# EAGLE board coreTwo (EAGLE 5.07)
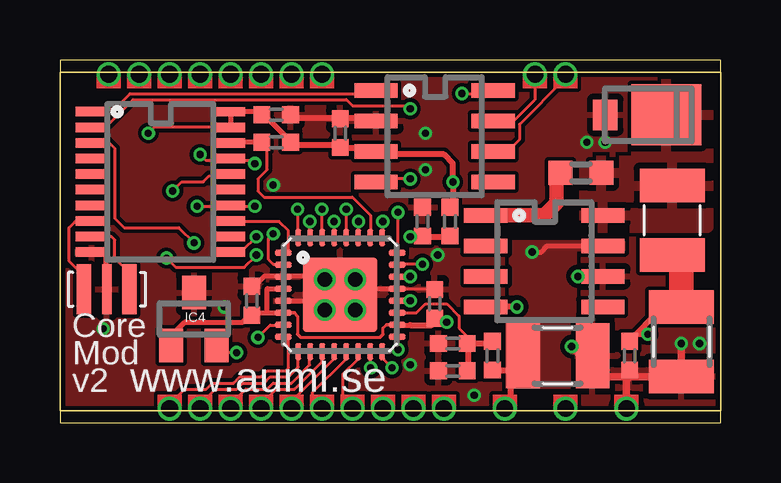
[diagram p0: board, top side]
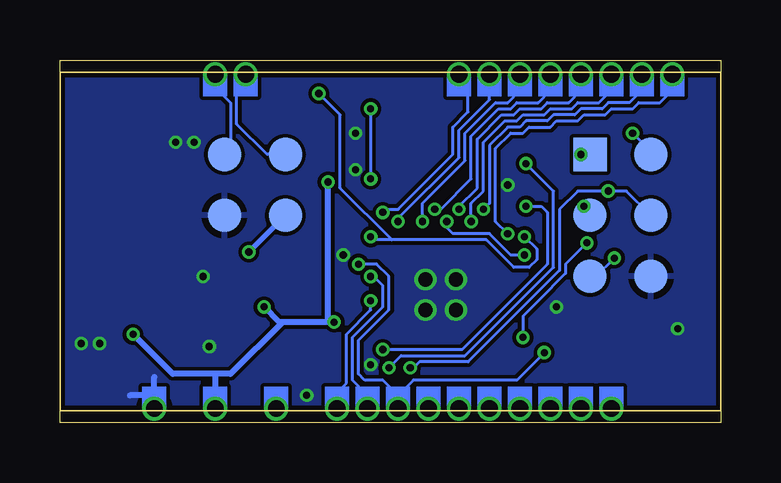
[diagram p1: board, bottom side, seen from below]

Size 27.56 x 15.11 mm. Coordinates in mm from the lower left corner, seen from the top.
Outline: 27.56,0.51 27.56,14.61
Outline: 27.56,14.61 27.56,15.11 0,15.11 0,14.61
Outline: 0,14.61 0,0.51
Outline: 0,0.51 0,0 27.56,0 27.56,0.51
Outline: 27.56,14.61 0,14.61
Outline: 0,0.51 27.56,0.51
Copper layers (1*16): Top 0.035mm / dielectric 1.5mm / Bottom 0.035mm
Design rules "10mils, 0.6drill *": minimum track width 5mil, minimum drill 0.3mm, track to track 5mil, track to pad 5mil, pad to pad 6mil, via to via 6mil, smd to smd 0mil, copper to edge 8mil, drill to drill 10mil, minimum pad ring 1mil, minimum via ring 5mil, stop-mask expansion 0mil, vias tented up to drill 0.7mm, thermal gap 10mil
Milling: 4 lines

## Footprints (pad centres in the part's own frame; a part is rotated, then mirrored left to right if it is on the bottom)
C0402 = smd 0.7 x 0.7: 1 -0.6,0; 2 0.6,0
C0603 = smd 1 x 1: 1 -0.85,0; 2 0.85,0
C1210 = smd 1.4 x 2.7: 1 -1.4,0; 2 1.5,0
CORETWO_PIN = drill 0.7 pad 1 round: 1 0,-0.084
DO-220AA = smd 1.016 x 1.27: A 1.143,0 | smd 2.921 x 2.54: C -1.397,0
TSSOP = smd 0.396 x 1.3: 1 -2.925,-2.875; 2 -2.275,-2.875; 3 -1.625,-2.875; 4 -0.975,-2.875; 5 -0.325,-2.875; 6 0.325,-2.875; 7 0.975,-2.875; 8 1.625,-2.875; 9 2.275,-2.875; 10 2.925,-2.875; 11 2.925,2.875; 12 2.275,2.875; 13 1.625,2.875; 14 0.975,2.875; 15 0.325,2.875; 16 -0.325,2.875; 17 -0.975,2.875; 18 -1.625,2.875; 19 -2.275,2.875 | smd 0.369 x 1.3: 20 -2.925,2.875
SOIC = smd 0.6 x 1.8: 1 -1.905,-2.44; 2 -0.635,-2.44; 3 0.635,-2.44; 4 1.905,-2.44; 5 1.905,2.44; 6 0.635,2.44; 7 -0.635,2.44; 8 -1.905,2.44
MLF32 = smd 0.7 x 0.24: 1 -2.375,1.75; 2 -2.375,1.25; 3 -2.375,0.75; 4 -2.375,0.25; 5 -2.375,-0.25; 6 -2.375,-0.75; 7 -2.375,-1.25; 8 -2.375,-1.75; 17 2.375,-1.75; 18 2.375,-1.25; 19 2.375,-0.75; 20 2.375,-0.25; 21 2.375,0.25; 22 2.375,0.75; 23 2.375,1.25; 24 2.375,1.75 | smd 0.24 x 0.7: 9 -1.75,-2.375; 10 -1.25,-2.375; 11 -0.75,-2.375; 12 -0.25,-2.375; 13 0.25,-2.375; 14 0.75,-2.375; 15 1.25,-2.375; 16 1.75,-2.375; 25 1.75,2.375; 26 1.25,2.375; 27 0.75,2.375; 28 0.25,2.375; 29 -0.25,2.375; 30 -0.75,2.375; 31 -1.25,2.375; 32 -1.75,2.375 | smd 3.1 x 3.1: BPAD 0,0
SOT23 = smd 1 x 1.4: 1 -0.95,-1.1; 2 0.95,-1.1; 3 0,1.1
SO8 = smd 0.6 x 1.8: 1 -1.905,-2.44; 2 -0.635,-2.44; 3 0.635,-2.44; 4 1.905,-2.44; 5 1.905,2.44; 6 0.635,2.44; 7 -0.635,2.44; 8 -1.905,2.44
1X01_SMD = smd 1.4 x 1.4: 1 0,0
L1210 = smd 1.4 x 2.7: 1 -1.4,0; 2 1.5,0
SMD = smd 0.6 x 2.1: 1 -0.27,0.1; 3 1.63,0.1 | smd 0.4 x 2.1: 2 0.68,0.1
R0402 = smd 0.7 x 0.7: 1 -0.6,0; 2 0.6,0
6PINSMD = smd 1.4 x 1.4 bottom: 1 0,2.54; 2 -2.54,2.54; 3 0,0; 4 -2.54,0; 5 0,-2.54; 6 -2.54,-2.54

## Placement (x,y rotation side)
C10  100n  [C0402]  11.68,12.07 90 top
C11  100n  [C0402]  15.62,4.95 90 top
C12  100n  [C0402]  9.02,12.83 0 top
C13  100n  [C0402]  8,5.08 90 top
C20  [C0402]  16.38,3.3 180 top
C40  [C0603]  21.72,10.41 0 top
C41  [C1210]  20.7,2.79 0 top
C42  [C1210]  25.91,3.43 270 top
C43  [C0402]  23.75,2.79 270 top
CANH  CORETWO_PIN  [CORETWO_PIN]  19.81,14.61 0 top
CANL  CORETWO_PIN  [CORETWO_PIN]  21.08,14.61 0 top
D1  [DO-220AA]  23.88,12.83 180 top
EXP_A  CORETWO_PIN  [CORETWO_PIN]  4.57,0.51 180 top
EXP_B  CORETWO_PIN  [CORETWO_PIN]  12.19,0.51 180 top
EXP_C  CORETWO_PIN  [CORETWO_PIN]  10.92,0.51 180 top
EXP_D  CORETWO_PIN  [CORETWO_PIN]  9.65,0.51 180 top
EXP_E  CORETWO_PIN  [CORETWO_PIN]  8.38,0.51 180 top
EXP_F  CORETWO_PIN  [CORETWO_PIN]  7.11,0.51 180 top
EXP_G  CORETWO_PIN  [CORETWO_PIN]  5.84,0.51 180 top
EXP_H  CORETWO_PIN  [CORETWO_PIN]  2.03,14.61 0 top
EXP_I  CORETWO_PIN  [CORETWO_PIN]  3.3,14.61 0 top
EXP_J  CORETWO_PIN  [CORETWO_PIN]  4.57,14.61 0 top
EXP_K  CORETWO_PIN  [CORETWO_PIN]  5.84,14.61 0 top
EXP_L  CORETWO_PIN  [CORETWO_PIN]  7.11,14.61 0 top
EXP_M  CORETWO_PIN  [CORETWO_PIN]  8.38,14.61 0 top
EXP_N  CORETWO_PIN  [CORETWO_PIN]  9.65,14.61 0 top
EXP_O  CORETWO_PIN  [CORETWO_PIN]  10.92,14.61 0 top
EXP_P  CORETWO_PIN  [CORETWO_PIN]  13.46,0.51 180 top
EXP_Q  CORETWO_PIN  [CORETWO_PIN]  14.73,0.51 180 top
EXP_R  CORETWO_PIN  [CORETWO_PIN]  16,0.51 180 top
GND  CORETWO_PIN  [CORETWO_PIN]  23.62,0.51 180 top
IC1  MCP2515  [TSSOP]  4.19,10.04 270 top
IC2  MCP2551  [SOIC]  15.62,11.94 270 top
IC3  ATMEGA88-M32  [MLF32]  11.68,5.33 0 top
IC4  TC1047A  [SOT23]  5.59,4.32 0 top
IC5  [SO8]  20.19,6.73 270 top
JP1  [1X01_SMD]  20.7,8.64 0 bottom
JP2  [1X01_SMD]  20.7,11.18 0 bottom
JP3  [1X01_SMD]  18.16,8.64 0 bottom
JP4  [1X01_SMD]  18.16,11.18 0 bottom
L1  [L1210]  25.53,8.38 90 top
Q1  [SMD]  1.27,5.46 0 top
R1  [R0402]  9.02,11.68 180 top
R50  [R0402]  18.03,2.79 270 top
R51  [R0402]  16.38,2.16 0 top
R52  [R0402]  16.26,8.38 90 top
R53  [R0402]  15.11,8.38 270 top
V_CAN  CORETWO_PIN  [CORETWO_PIN]  18.54,0.51 180 top
VCC  CORETWO_PIN  [CORETWO_PIN]  21.08,0.51 180 top
X2  AVRISP6PIN  [6PINSMD]  5.46,8.64 0 top

## Library data of the parts
C10-C13 C20 C40-C43 L1 R1 R50-R53 = rcl
CANH CANL EXP_A EXP_B EXP_C EXP_D EXP_E EXP_F EXP_G EXP_H EXP_I EXP_J EXP_K EXP_L EXP_M EXP_N EXP_O EXP_P EXP_Q EXP_R GND V_CAN VCC = expboard
D1 = diode
IC1 = mcp2515
IC2 = mcp2551
IC3 = atmega88
IC4 = tc1047a
IC5 = lm2674
JP1-JP4 = pinhead-mm
Q1 = xtal_CSTCE
X2 = avrisp

## Nets
CAN_RS: IC1.11 IC2.8 R52.1 R53.2
CANH: CANH.1 IC2.7 JP4.1
CANL: CANL.1 IC2.6 JP2.1
CB: C40.1 IC5.1
CLK: IC1.3 IC3.7
CS: IC1.18 IC3.26 R1.2
EXP_A: EXP_A.1 IC3.8
EXP_B: EXP_B.1 IC3.14
EXP_C: EXP_C.1 IC3.13
EXP_D: EXP_D.1 IC3.12
EXP_E: EXP_E.1 IC3.11
EXP_F: EXP_F.1 IC3.10
EXP_G: EXP_G.1 IC3.9
EXP_H: EXP_H.1 IC3.2
EXP_I: EXP_I.1 IC3.32
EXP_J: EXP_J.1 IC3.31
EXP_K: EXP_K.1 IC3.30
EXP_L: EXP_L.1 IC3.28
EXP_M: EXP_M.1 IC3.27
EXP_N: EXP_N.1 IC3.25
EXP_O: EXP_O.1 IC3.24
EXP_P: EXP_P.1 IC3.23 IC4.2
EXP_Q: EXP_Q.1 IC3.22
EXP_R: EXP_R.1 IC3.20
GND: C10.2 C11.2 C12.2 C13.2 C20.2 C41.2 C42.2 C43.2 D1.A GND.1 IC1.10 IC2.2 IC3.3 IC3.5 IC3.21 IC3.BPAD IC4.3 IC5.6 JP1.1 Q1.2 R51.1 R53.1 X2.6
INT: IC1.13 IC3.1
MISO: IC1.17 IC3.16 X2.1
MOSI: IC1.16 IC3.15 X2.4
OSC1: IC1.9 Q1.3
OSC2: IC1.8 Q1.1
RESET: IC3.29 X2.5
RXCAN: IC1.2 IC2.4
SCK: IC1.14 IC3.17 X2.3
TXCAN: IC1.1 IC2.1
V_CAN: C41.1 IC5.7 JP3.1 R50.2 V_CAN.1
V_CAN-FEEDBACK: C20.1 IC3.19 R50.1 R51.2
VCC: C10.1 C11.1 C12.1 C13.1 C42.1 C43.1 IC1.19 IC1.20 IC2.3 IC3.4 IC3.6 IC3.18 IC4.1 IC5.4 L1.1 R1.1 R52.2 VCC.1 X2.2
VSW: C40.2 D1.C IC5.8 L1.2

## Tracks (layer width: path | path; a pad name or v marks a point on that pad's centre or on a via)
CAN_RS  (via drill 0.3)
  Top 0.127: IC1.11 7.62,7.11 7.62,7.18 | 7.62,7.18 7.56,7.18 | 7.62,7.18 v8.19,7.75 | v16.76,13.72 17.93,13.72 IC2.8 | v14.61,7.75 15.08,7.75 R53.2
  Top 0.254: R53.2 15.11,7.75 16.26,7.75 R52.1 16.38,7.78
  Bottom 0.127: v8.19,7.75 7.68,7.24 7.68,6.79 8,6.48 8.64,6.48 9.78,7.62 13.72,7.62 | 13.72,7.62 15.88,9.78 15.88,12.83 v16.76,13.72 | 13.72,7.62 14.48,7.62 v14.61,7.75
CANH
  Top 0.127: IC2.7 18.92,12.57 19.81,13.46 CANH.1
  Bottom 0.127: JP4.1 18.92,11.18 20.19,12.45 20.19,13.97 19.81,14.35 19.81,14.48 CANH.1
CANL
  Top 0.127: IC2.6 18.67,11.3 19.18,11.81 19.18,12.45 21.08,14.35 CANL.1
  Bottom 0.127: JP2.1 20.45,11.3 20.45,13.33 21.08,13.97 21.08,14.48 CANL.1
CB
  Top 0.152: C40.1 20.83,10.41 20.7,10.29
  Top 0.406: IC5.1 17.53,8.64
  Top 0.61: C40.1 20.83,10.38 | 20.7,10.29 20.7,9.14 20.19,8.64 IC5.1
CLK  (via drill 0.3)
  Top 0.127: IC3.7 9.29,4.08 9.27,4.06 8.76,4.06 v8.26,3.56 | v5.59,7.49 4.95,8.13 2.67,8.13 2.29,8.51 2.29,11.43 2.03,11.68 1.4,11.68 1.37,11.66 IC1.3
  Bottom 0.127: v8.26,3.56 8.26,4.45 7.62,5.08 6.48,6.22 6.48,6.6 v5.59,7.49
CS
  Top 0.127: IC3.26 12.93,7.64 12.95,7.62 12.95,8.64 12.19,9.4 8.51,9.4 8.26,9.65 8.26,10.16 8.64,10.54 8.64,11.43 8.51,11.56 8.51,11.68
  Top 0.203: IC1.18 7.09,11.66 7.11,11.68 8.51,11.68 R1.2
EXP_A
  Top 0.127: IC3.8 9.5,3.58 9.53,3.56 9.53,2.29 9.4,2.16 8.64,2.16 8.38,1.9 7.49,1.9 7.24,1.65 6.35,1.65 6.1,1.4 5.21,1.4 4.57,0.76 EXP_A.1
EXP_B
  Top 0.127: IC3.14 12.43,2.93 12.45,2.92 12.45,2.67 11.81,2.03 11.81,1.14 EXP_B.1 12.19,0.63
EXP_C
  Top 0.127: IC3.13 11.93,2.92 11.94,2.92 11.94,2.67 10.54,1.27 10.54,1.02 EXP_C.1
EXP_D
  Top 0.127: IC3.12 11.43,2.92 11.43,2.67 9.78,1.02 9.65,1.02 EXP_D.1
EXP_E
  Top 0.127: IC3.11 10.93,2.93 10.92,2.92 10.92,2.54 9.78,1.4 9.02,1.4 8.51,0.89 EXP_E.1
EXP_F
  Top 0.127: IC3.10 10.43,2.94 10.41,2.92 10.41,2.41 9.65,1.65 8.89,1.65 8.64,1.4 7.75,1.4 7.11,0.76 EXP_F.1
EXP_G
  Top 0.127: IC3.9 9.93,2.31 9.53,1.9 8.76,1.9 8.51,1.65 7.62,1.65 7.37,1.4 6.48,1.4 5.84,0.76 EXP_G.1
EXP_H  (via drill 0.3)
  Top 0.127: IC3.2 9.29,6.6 8.89,6.6 8.7,6.79 8.7,7.68 v8.89,7.87
  Bottom 0.127: v8.89,7.87 9.4,8.38 9.4,11.43 8.76,12.07 8.26,12.07 8,12.32 7.11,12.32 6.86,12.57 5.97,12.57 5.71,12.83 4.83,12.83 4.57,13.08 3.68,13.08 3.43,13.33 2.54,13.33 2.03,13.84 2.03,14.48 EXP_H.1
EXP_I  (via drill 0.3)
  Top 0.127: IC3.32 9.93,7.85 9.91,7.87 v9.91,8.89
  Bottom 0.127: v9.91,8.89 9.65,9.14 9.65,11.56 8.89,12.32 8.38,12.32 8.13,12.57 7.24,12.57 6.98,12.83 6.1,12.83 5.84,13.08 4.95,13.08 4.7,13.33 3.81,13.33 3.3,13.84 3.3,14.48 EXP_I.1
EXP_J  (via drill 0.3)
  Top 0.127: IC3.31 10.43,7.64 10.41,7.62 v10.41,8.38
  Bottom 0.127: EXP_J.1 4.57,14.48 4.57,13.84 5.08,13.33 5.97,13.33 6.22,13.08 7.11,13.08 7.37,12.83 8.26,12.83 8.51,12.57 9.02,12.57 9.91,11.68 9.91,9.65 10.41,9.14 v10.41,8.38
EXP_K  (via drill 0.3)
  Top 0.127: v10.92,8.89 10.92,7.75 10.93,7.73 IC3.30
  Bottom 0.127: v10.92,8.89 10.92,9.02 10.16,9.78 10.16,11.81 9.14,12.83 8.64,12.83 8.38,13.08 7.49,13.08 7.24,13.33 6.35,13.33 5.84,13.84 5.84,14.48 EXP_K.1
EXP_L  (via drill 0.3)
  Top 0.127: v11.94,8.89 11.94,7.75 11.93,7.74 IC3.28
  Bottom 0.127: EXP_L.1 7.11,13.84 7.62,13.33 8.51,13.33 8.76,13.08 9.27,13.08 10.41,11.94 10.41,10.16 11.68,8.89 v11.94,8.89
EXP_M  (via drill 0.3)
  Top 0.127: v12.45,8.38 12.45,7.75 12.43,7.73 IC3.27
  Bottom 0.127: EXP_M.1 8.38,14.48 8.38,13.84 8.89,13.33 9.4,13.33 10.67,12.07 10.67,10.92 12.45,9.14 v12.45,8.38
EXP_N  (via drill 0.3)
  Top 0.127: IC3.25 13.43,7.72 13.46,7.75 v13.46,8.38
  Bottom 0.127: EXP_N.1 9.65,14.48 9.65,13.46 10.92,12.19 10.92,11.05 13.46,8.51 v13.46,8.38
EXP_O  (via drill 0.3)
  Top 0.127: IC3.24 14.07,7.08 14.1,7.11 v14.1,8.76
  Bottom 0.127: 10.92,14.48 EXP_O.1 10.54,14.48 10.54,12.95 11.18,12.32 11.18,11.18 13.46,8.89 13.97,8.89 v14.1,8.76
EXP_P  (via drill 0.3)
  Top 0.127: IC3.23 14.08,6.58 14.1,6.6 v15.11,6.6 | IC4.2 6.86,3.22 6.86,2.92 v7.37,2.92
  Bottom 0.127: v15.11,6.6 14.35,6.6 13.84,6.1 13.84,4.7 15.11,3.43 15.11,2.03 14.86,1.78 14.1,1.78 13.46,1.14 | 13.46,1.14 EXP_P.1 | v7.37,2.92 8.51,1.78 12.83,1.78 13.46,1.14
EXP_Q  (via drill 0.3)
  Top 0.127: IC3.22 14.09,6.08 14.1,6.1 v14.61,6.1
  Bottom 0.127: v14.61,6.1 14.48,6.1 14.1,5.71 14.1,4.83 15.37,3.56 15.37,1.78 15.11,1.52 15.11,0.89 EXP_Q.1
EXP_R  (via drill 0.3)
  Top 0.203: IC3.20 v14.6,5.08 v14.61,5.08
  Bottom 0.127: v14.61,5.08 14.61,4.7 15.62,3.68 15.62,1.65 16,1.27 EXP_R.1
GND  (via drill 0.3, 0.6)
  Top 0.127: IC3.21 15.49,5.58
  Top 0.203: C13.2 8.13,5.71 8.51,6.1 9.27,6.1 9.28,6.08 IC3.3 9.39,6.08 9.4,6.1 10.92,6.1 v11.05,5.97 IC3.BPAD | IC3.5 9.39,5.08 9.4,5.08 11.43,5.08 IC3.BPAD | IC3.21 13.97,5.58 13.97,5.59 11.94,5.59 IC3.BPAD | C11.2 15.62,5.59 15.49,5.58 | Q1.2 1.91,5.61 1.91,7.11 1.9,7.11 IC1.10
  Top 0.254: IC2.2 13.18,12.6 13.08,12.7 11.68,12.7 | C12.2 9.65,12.83 9.78,12.7 11.68,12.7 | 11.68,12.7 C10.2 | v21.59,6.1 IC5.6
  Top 0.305: 23.88,1.9 23.84,1.94 C43.2 23.75,1.9 | 23.88,1.9 25.91,1.9 C42.2 v25.91,3.3 | 23.75,1.9 22.61,1.9 22.2,2.31 C41.2 21.84,2.67 v21.34,3.17 | 23.75,1.9 23.88,1.9 | 23.75,1.9 23.62,1.78 GND.1
  Bottom 0.254: 23.62,1.9 23.62,1.14 24.64,1.14
  other vias: 22.73,11.68 15.24,12.07 12.32,5.97 11.05,4.7 12.32,4.7 6.86,4.83 1.8,3.91 8.89,9.91 21.97,11.68 26.67,3.3 17.27,1.14 14.61,2.41 15.75,6.98 15.24,10.54
  pour Bottom (isolate 0.152, rank 3): 27.56,14.61 27.56,0.51 0,0.51 0,14.61
  pour Top (isolate 0.152, rank 3): 27.56,14.61 27.56,0.51 0,0.51 0,14.61
INT
  Top 0.127: IC3.1 9.27,7.11 9.53,7.11 9.53,8 9.14,8.38 7.11,8.38 7.08,8.41 IC1.13
MISO  (via drill 0.3)
  Top 0.127: IC3.16 13.46,2.67 v13.84,2.29 | v5.84,11.18 6.1,10.92 6.98,10.92 6.98,10.93 IC1.17 7.06,10.97 7.11,10.92 8,10.92 v8.13,10.79
  Bottom 0.127: v13.84,2.29 13.34,2.79 10.67,2.79 6.98,6.48 6.98,9.65 v8.13,10.79 | v5.84,11.18 X2.1
MOSI  (via drill 0.3)
  Top 0.127: IC3.15 12.95,2.94 v12.95,2.29 | v4.7,9.65 5.08,10.03 5.97,10.03 6.22,10.29 7.11,10.29 IC1.16
  Bottom 0.127: v12.95,2.29 12.83,2.29 12.57,2.54 10.54,2.54 6.73,6.35 6.73,8.89 5.97,9.65 v4.7,9.65 3.94,9.65 X2.4
OSC1
  Top 0.127: 1.4,7.75 1.38,7.76 IC1.9 1.4,7.75 | 1.4,7.75 2.16,7.75 2.29,7.62 2.29,6.86 2.9,6.25 Q1.3
OSC2
  Top 0.127: IC1.8 1.3,8.41 1.27,8.38 0.63,8.38 0.38,8.13 0.38,6.73 0.89,6.22 0.89,5.59 0.92,5.56 Q1.1
RESET  (via drill 0.3)
  Top 0.127: v11.43,8.38 11.43,7.75 11.43,7.74 IC3.29 | v8.19,6.98 7.68,6.48 4.83,6.48 v4.45,6.86
  Bottom 0.127: v11.43,8.38 11.43,8.13 11.18,7.87 9.65,7.87 8.76,6.98 v8.19,6.98 | X2.5 5.21,6.1 v4.45,6.86
RXCAN  (via drill 0.3)
  Top 0.127: IC1.2 1.39,12.31 1.52,12.45 2.03,12.45 3.05,13.46 11.94,13.46 12.19,13.21 14.48,13.21 v14.61,13.08 | IC2.4 13.21,10.03 13.34,10.16 v14.61,10.16
  Bottom 0.127: v14.61,13.08 v14.61,10.16
SCK  (via drill 0.3)
  Top 0.127: IC3.17 14.09,3.56 14.1,3.56 v14.1,3.05 | v5.71,9.02 7.11,9.02 | 7.11,9.02 IC1.14 | 7.11,9.02 v8.13,9.02
  Bottom 0.127: v14.1,3.05 10.79,3.05 7.24,6.6 7.24,8.76 7.49,9.02 v8.13,9.02 | X2.3 5.46,8.76 v5.71,9.02
TXCAN
  Top 0.127: IC1.1 1.31,13 1.4,13.08 2.29,13.08 2.92,13.72 13.08,13.72 13.21,13.84 IC2.1
V_CAN  (via drill 0.3)
  Top 0.203: v19.68,7.11 20.07,7.11 20.32,7.37 IC5.7
  Top 0.254: V_CAN.1 18.54,0.76 18.8,1.02 18.8,2.16 | C41.1 19.3,2.67 18.8,2.16 | R50.2 18.03,2.16 18.8,2.16
  Bottom 0.203: JP3.1 v19.68,7.11
  pour Top (isolate 0.203, no thermals): 18.8,7.49 18.8,1.52 21.46,1.52 21.46,7.24 23.5,7.24 23.5,7.49
V_CAN-FEEDBACK
  Top 0.127: 14.1,4.57 14.86,4.57 15.24,4.95 16.13,4.95 16.64,4.45 16.64,3.94 17.02,3.56 C20.1
  Top 0.203: IC3.19 14.09,4.58 14.1,4.57 | C20.1 16.98,3.46
  Top 0.254: R50.1 18,3.39 17.91,3.3 17.02,3.3 | R51.2 17.11,2.25 17.02,2.29 17.02,3.3 | C20.1 17.02,3.3
VCC  (via drill 0.3)
  Top 0.127: IC3.4 9.28,5.58 9.27,5.59 | 9.78,4.57 9.91,4.45 9.91,3.68 | 10.03,3.56 13.34,3.56 | 13.46,3.68 13.46,3.94 13.61,4.08 | 7.11,12.32 7.07,12.32 | 7.07,12.32 IC1.19 | v3.68,12.07 3.94,12.32 7.07,12.32
  Top 0.152: IC3.6 9.39,4.58 9.4,4.57 9.78,4.57 | 9.91,3.68 10.03,3.56 | 13.34,3.56 13.46,3.68 | 13.61,4.08 IC3.18
  Top 0.203: IC3.18 14.08,4.08 14.1,4.06 14.61,4.06 | 7.11,12.95 8.26,12.95 8.38,12.83 C12.1 8.51,12.83 9.65,11.68 | IC1.20 7.11,12.96 7.11,12.95 | IC1.19 7.1,12.31 7.11,12.32 7.11,12.95 | IC3.6 9.28,4.58 9.27,4.57 8.64,4.57 | 8.64,4.57 8.26,4.57 8.16,4.48 C13.1 7.91,4.48 7.62,4.19 5.21,4.19 4.83,3.81 4.83,3.41 IC4.1 | 9.27,5.59 8.64,5.59 8.64,4.57
  Top 0.254: 23.88,3.56 23.66,3.52 | 23.66,3.52 C43.1 | C42.1 24.77,4.45 24,3.68 | 24,3.68 23.88,3.56 | 23.66,3.52 23.84,3.52 23.88,3.56 | v24.51,3.68 24,3.68 | C11.1 15.62,4.45 | C11.1 15.53,4.35 15.49,4.06 14.61,4.06 | R1.1 9.65,11.68 9.78,11.56 11.68,11.56 C10.1 11.68,11.43 12.95,11.43 13.08,11.3 IC2.3 13.18,11.2 13.21,11.18 16,11.18 16.38,10.79 v16.38,10.03 16.38,8.98 R52.2 | v16.13,4.19 15.78,4.19 C11.1 | v19.05,4.83 IC5.4
  Top 1.016: L1.1 25.91,6.6 C42.1 25.78,4.95
  Bottom 0.127: X2.2 2.92,11.3 v3.68,12.07
  Bottom 0.254: v24.51,3.68 22.86,2.03 21.08,2.03 | 21.08,2.03 20.45,2.03 18.29,4.19 | 21.08,2.03 VCC.1 | 18.29,4.19 v16.13,4.19 16.38,4.19 v16.38,10.03 | v19.05,4.83 18.41,4.19 18.29,4.19
VSW
  Top 0.305: 25.53,12.55 D1.C
  pour Top (isolate 0.203): 24,14.1 24,10.92 21.84,10.92 21.84,8.13 27.05,8.13 27.05,14.1

## Text on the board
Top: Copper, top side
Bottom: Copper, bottom side
tPlace: Core | Mod | v2 | www.auml.se | Silcscreen, top side
tStop: Soldermask, top side
bStop: Soldermask, bottom side
Milling: Cut border
Document: Creative Commons Attribution-Share Alike 3.0 Unported License | This work by http://projekt.auml.se is licensed under a | http://creativecommons.org/licenses/by-sa/3.0/
Reference: Component layout